# Altium PCB radhard.PcbDoc
Units mm, origin at the board's own origin, x right, y up, seen from the top; angles counter-clockwise.
Board outline 150 x 100 mm, 6 copper layers (Top Layer, Int1 (GND), Int2 (Sign), Int3 (Sign), Int4 (PWR), Bottom Layer), stack 1.551 mm thick; 48 components, 56 nets, 219 pads, 47 vias.
Unrouted connection lines stored in the file: 86.
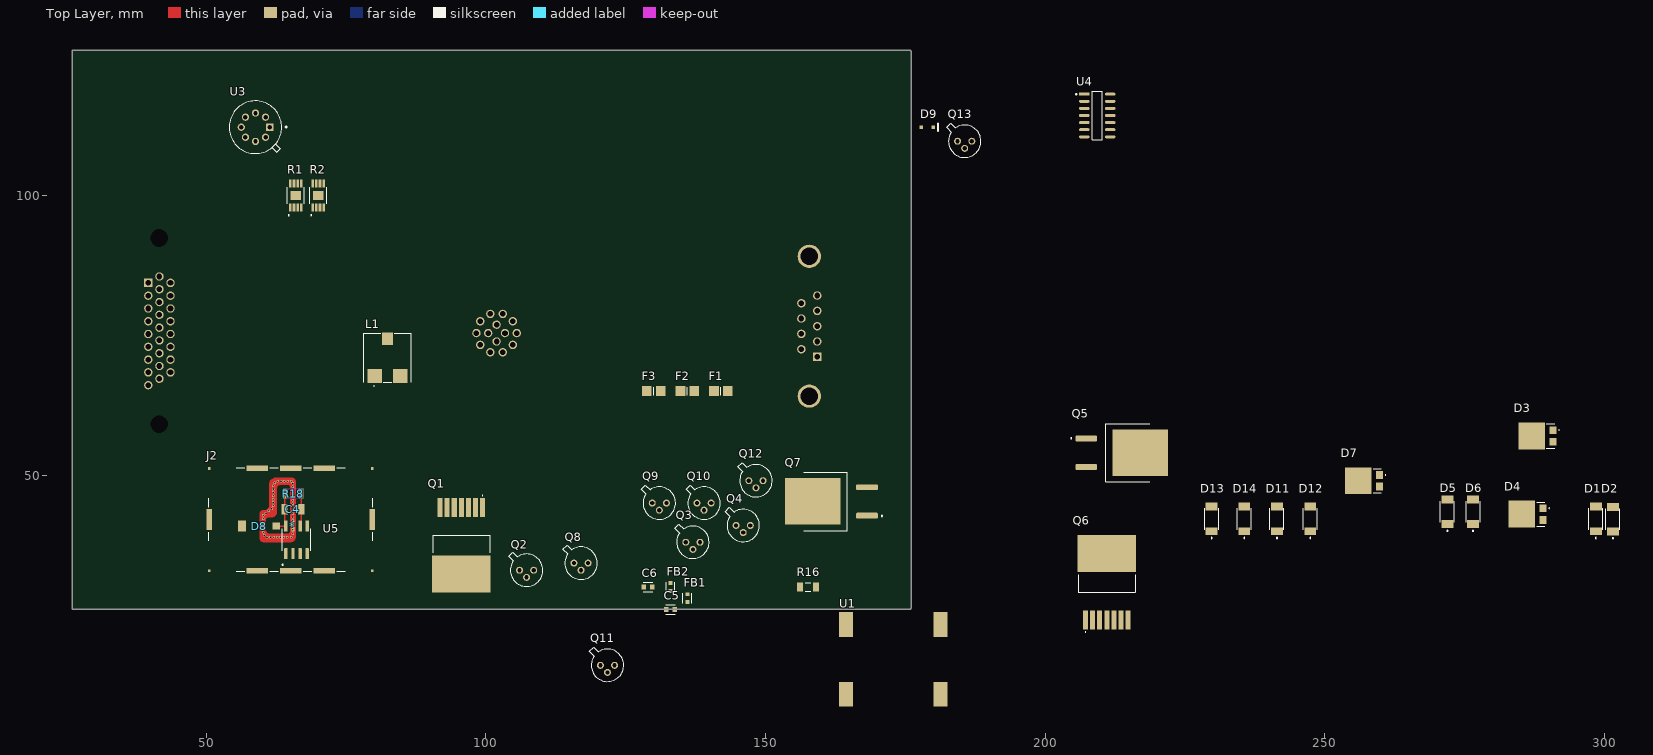
[diagram p0: Top Layer view]
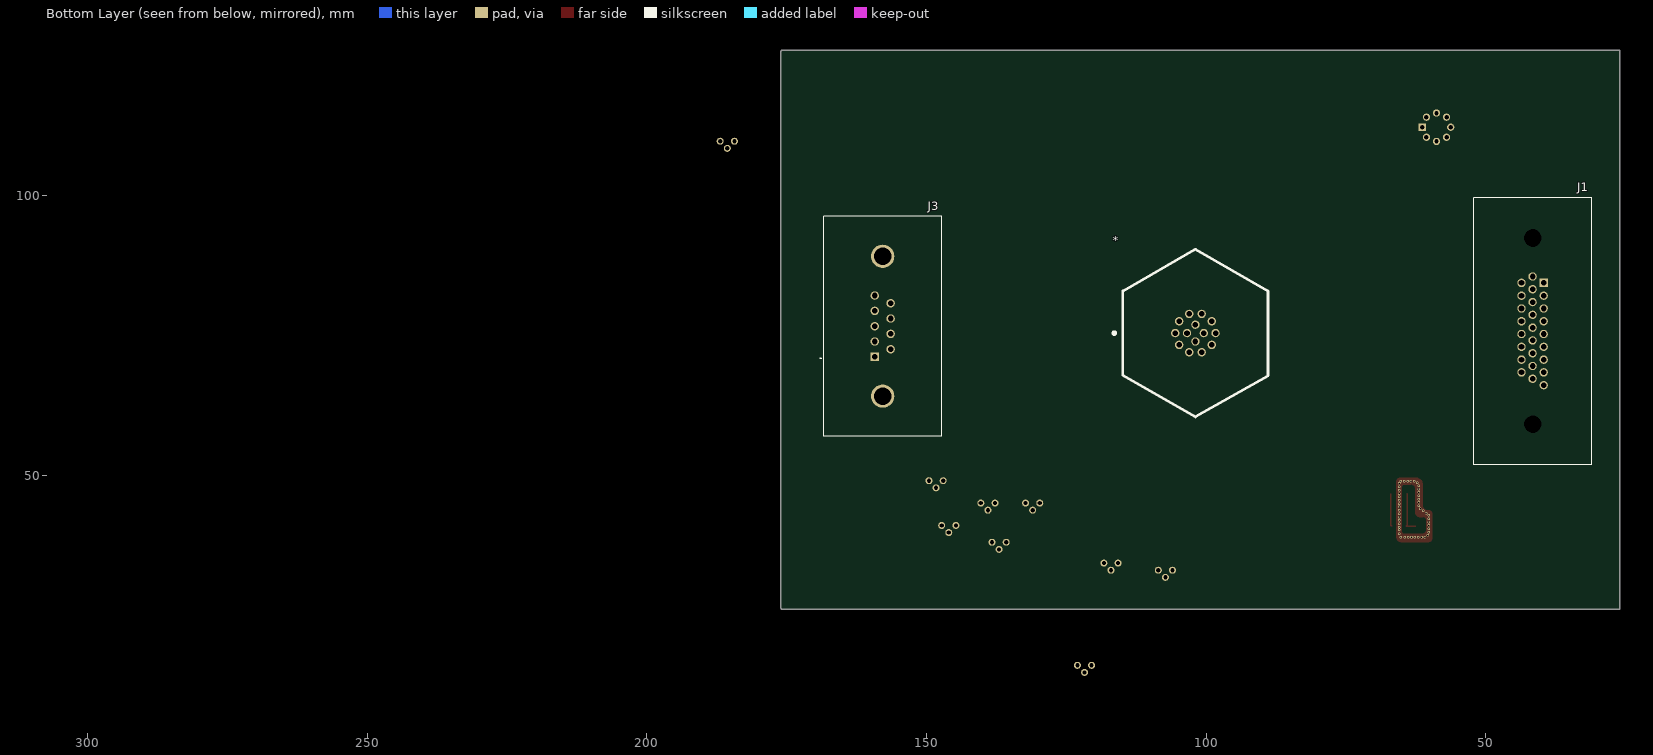
[diagram p1: Bottom Layer view, seen from below]
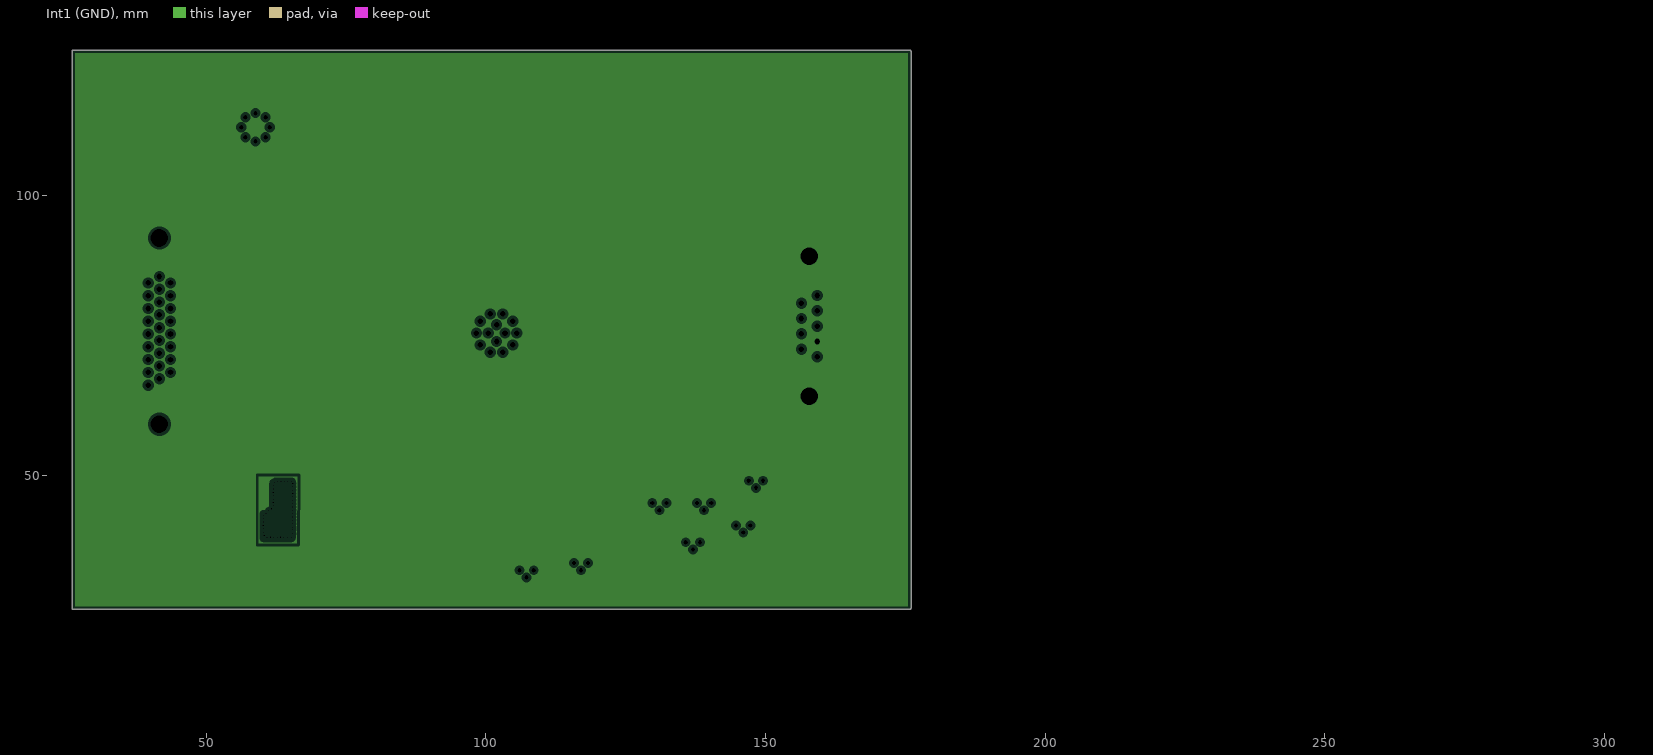
[diagram p2: Int1 (GND), clearances drawn from the general rule]
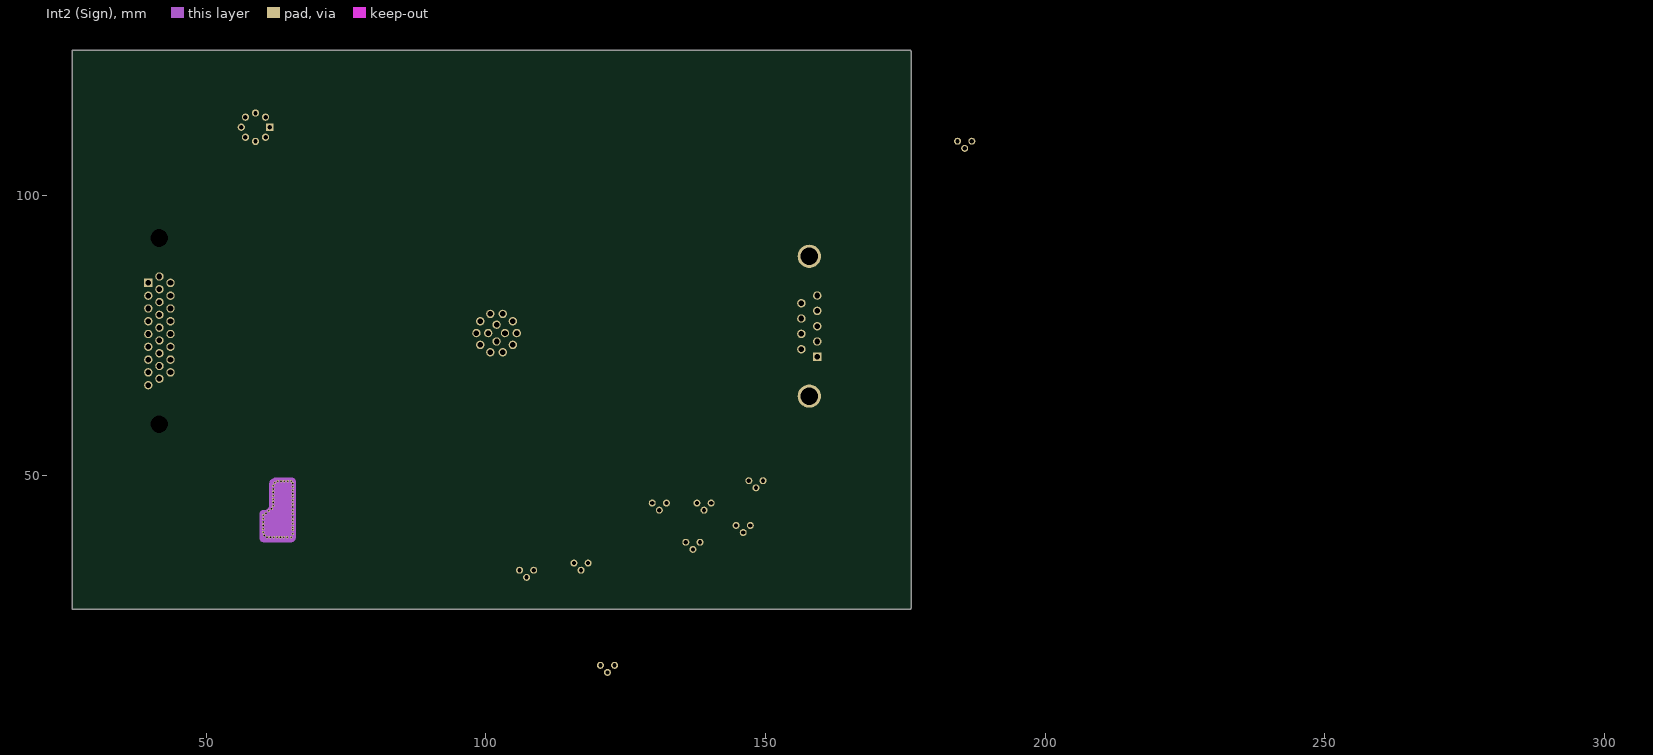
[diagram p3: Int2 (Sign)]
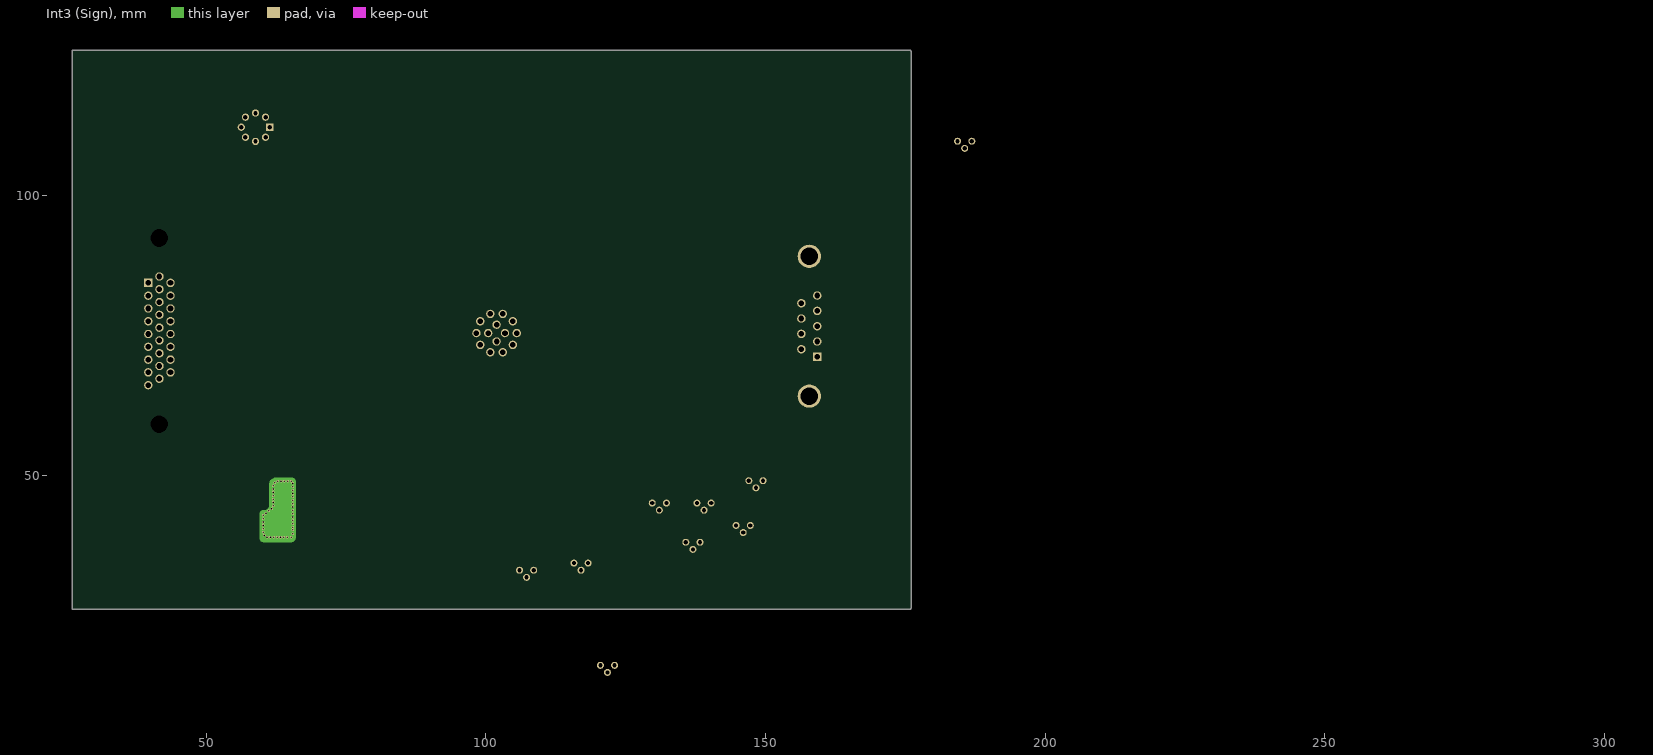
[diagram p4: Int3 (Sign)]
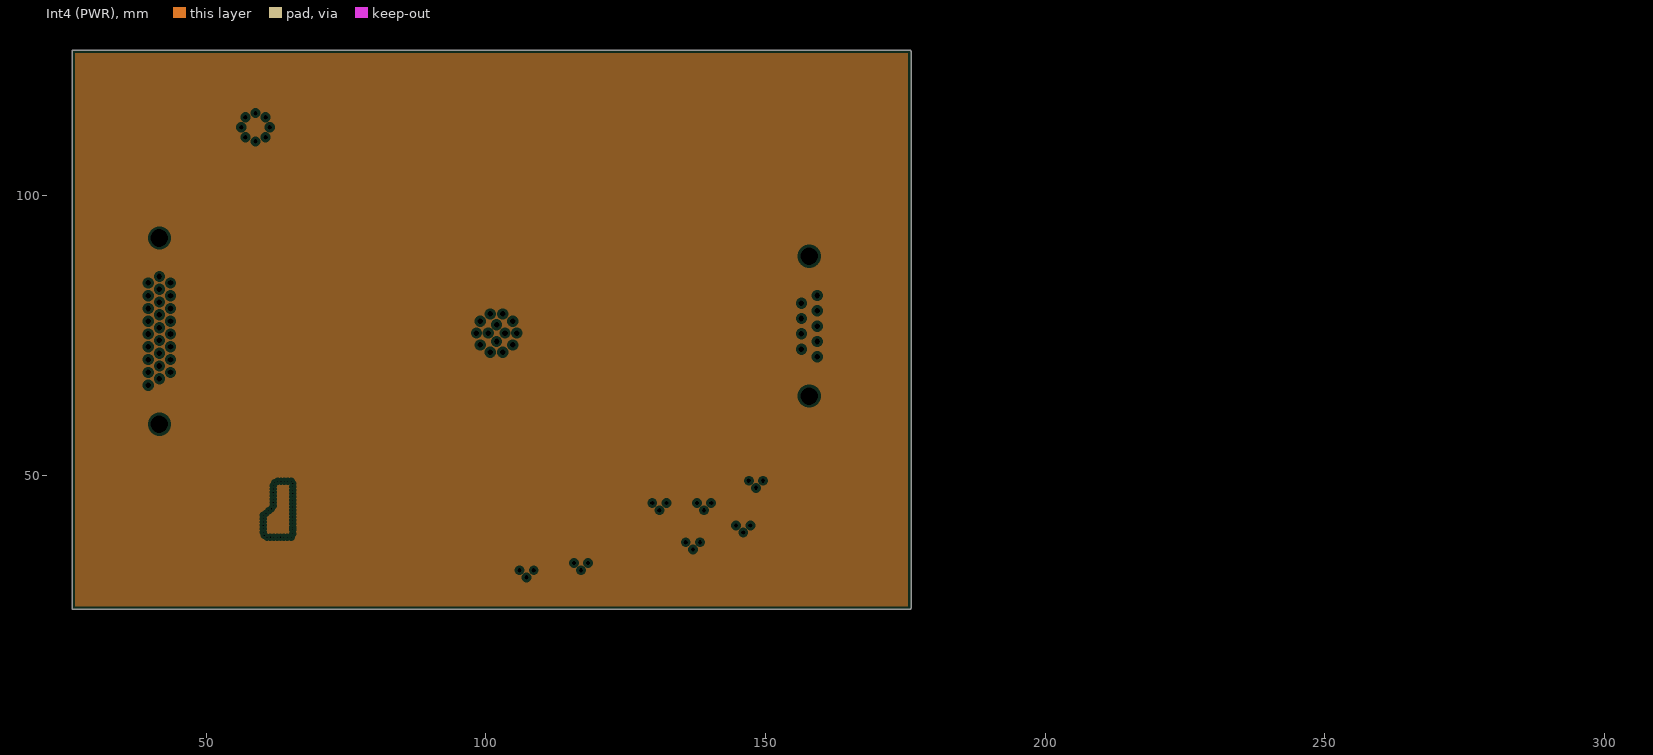
[diagram p5: Int4 (PWR), clearances drawn from the general rule]

## Layer stack, top to bottom
Top Solder: solder mask 0.0254, SM-001, Dk 4
Top Layer: signal copper 0.035
Dielectric 1: prepreg 0.0711, PP-006, Dk 4.1
Dielectric 2: prepreg 0.0711, PP-006, Dk 4.1
Int1 (GND): plane copper 0.035, net GND
Dielectric 3: core 0.4572, Core-035, Dk 4.7
Int2 (Sign): signal copper 0.035
Dielectric 4: prepreg 0.0711, PP-006, Dk 4.1
Dielectric 5: prepreg 0.0711, PP-006, Dk 4.1
Int3 (Sign): signal copper 0.035
Dielectric 6: core 0.4572, Core-035, Dk 4.7
Int4 (PWR): plane copper 0.035
Dielectric 7: prepreg 0.0711, PP-006, Dk 4.1
Dielectric 8: prepreg 0.0711, PP-006, Dk 4.1
Bottom Layer: signal copper 0.035
Bottom Solder: solder mask 0.0254, SM-001, Dk 4

## Board outline
26,26.254 26,125.746 cw(c26.254,125.746) 26.254,126 175.746,126 cw(c175.746,125.746) 176,125.746 176,26.254 cw(c175.746,26.254) 175.746,26 26.254,26 cw(c26.254,26.254)

## Design rules (kind name [scope] priority, off if disabled: settings)
Clearance [All] p1: gap=0.254 ignorepadtopadclearanceinfootprint=FALSE
ComponentClearance [All] p1: gap=0 collisioncheckmode=3 verticalgap=0.254 showdistances=FALSE
PlaneClearance [All] p1: clearance=0.508
PlaneConnect [All] p1: planeconnectstyle=Relief reliefexpansion=0.508 reliefentries=4 reliefconductorwidth=0.254 reliefairgap=0.254
PolygonConnect [All] p1: connectstyle=Relief reliefconductorwidth=0.254 reliefentries=4 polygonreliefangle="90 Angle" airgapwidth=0.254
RoutingVias [All] p1: holewidth=0.711 width=1.27 viastyle="Through Hole" minholewidth=0.711 minwidth=1.27 maxholewidth=0.711 maxwidth=1.27
SolderMaskExpansion [All] p1: expansion=0.102 istentingtop=FALSE
Width [All] p1: maxlimit=0.254 minlimit=0.254 preferedwidth=0.254
27 further rules are at their usual default settings.

## Classes and differential pairs
component class Interface: * J1 J3
component class Dosimeter: * C4 C5 C6 D8 FB1 FB2 J2 R15 R16 R18 U5
component class VoltageReference: D9 Q13 R1 R2 U3 U4
component class PowerSection: D1 D2 D3 D4 D5 D6 D7 D11 D12 D13 D14 F1 F2 F3 L1 Q1 Q2 Q3 Q4 Q5 Q6 Q7 Q8 Q9 Q10 Q11 Q12 U1

## Components (designator, comment, footprint, x,y, rotation, side; value= is the part's Value field where it differs from the comment)
* "Component_1" Guard 58.666,43.311 r0 top
* "ACRK-16-01-G-T-B1-M-1" PCBComponent_1 101.9,75.4 r180 bottom
C4 "12065A5R6DAT2A" CAPC3216X94N 65.5,43.9 r0 top
C5 "CC0603KRX7R7BB105" FP-CC0603-DA-MFG 133,26 r0 top value="1 uF"
C6 "CC0603KRX7R7BB105" FP-CC0603-DA-MFG 129,30 r0 top value="1 uF"
D1 "PTVS12VP1UP,115" PMEG3050EP115 298.45,42.164 r90 top
D2 "PTVS12VP1UP,115" PMEG3050EP115 301.498,42.123 r90 top
D3 "YQ15RSM10SDTL1" YQ15RSM10SDTL1 288,57 r90 top
D4 "YQ15RSM10SDTL1" YQ15RSM10SDTL1 286.235,43.04 r90 top
D5 "PTVS12VP1UP,115" PMEG3050EP115 271.907,43.434 r90 top
D6 "PTVS12VP1UP,115" PMEG3050EP115 276.479,43.434 r90 top
D7 "YQ15RSM10SDTL1" YQ15RSM10SDTL1 257,49 r90 top
D8 "BPW_34_SR-Z" DIO_BPW_34_SR-Z 59.45,40.9 r180 top
D9 "1N4148WS-E3-08" VISH-SOD-323-2_V 178.9,112.2 r0 top
D11 "PTVS12VP1UP,115" PMEG3050EP115 241.427,42.164 r90 top
D12 "PTVS12VP1UP,115" PMEG3050EP115 247.396,42.164 r90 top
D13 "PTVS12VP1UP,115" PMEG3050EP115 229.743,42.164 r90 top
D14 "PTVS12VP1UP,115" PMEG3050EP115 235.585,42.164 r90 top
F1 "0483005.DR" FUSC3316X137N 142,65 r0 top
F2 "0483010.DR" FUSC3316X137N 136,65 r0 top
F3 "0483005.DR" FUSC3316X137N 130,65 r0 top
FB1 "MH1608-601Y" FP-MH1608-MFG 136,28 r90 top
FB2 "MH1608-601Y" FP-MH1608-MFG 133,30 r90 top
J1 "MDBRA26PEAN0" MDBRA26PEAN0 39.64,84.372 r270 bottom
J2 "2118728-2" TE_2118728-2 65.1,42.05 r180 top
J3 "MDBRE09PE860" AMPHENOL_MDBRE09PE860 157.82,76.63 r90 bottom
L1 "SER8052-402MEC" SER8052402MEC 82.4,71 r0 top
Q1 "UJ4SC075018B7S" UJ4SC075018B7S 95.6,37 r180 top
Q2 "2N2222A" STM-TO-18-3 107.27,33 r0 top
Q3 "2N2222A" STM-TO-18-3 137,38 r0 top
Q4 "2N2222A" STM-TO-18-3 146,41 r0 top
Q5 "IXTA6N100D2" DPAK254P1524X483-3N 213.66,54 r0 top
Q6 "UJ4SC075018B7S" UJ4SC075018B7S 211,31.301 r0 top
Q7 "IXTA6N100D2" DPAK254P1524X483-3N 161.8,45.3 r180 top
Q8 "2N2222A" STM-TO-18-3 117,34.27 r0 top
Q9 "2N2222A" STM-TO-18-3 131,45 r0 top
Q10 "2N2222A" STM-TO-18-3 139,45 r0 top
Q11 "2N2222A" STM-TO-18-3 121.73,16 r0 top
Q12 "2N2222A" STM-TO-18-3 148.27,49 r0 top
Q13 "2N2222A" STM-TO-18-3 185.6,109.7 r0 top
R1 "LT5400ACMS8E-3#PBF" SOP65P490X110-9N 66,100 r90 top
R2 "LT5400BHMS8E-8#TRPBF" SOP65P490X110-9N 70,100 r90 top
R16 "ERJ-8GEYJ241V" RESC3216X70X50NL05T20 157.575,30 r0 top
R18 "CRHP1206AF1G00FKET" RES_CRHP1206_VIS 65.552,46.7 r0 top
U1 "CH4659-ALD" CH4659-ALD_COC 172.6,17.054 r90 top
U3 "LTZ1000ACH#PBF" FP-H-8-05-08-1320-MFG 58.796,112.204 r0 top
U4 "ADA4522-4ARZ-RL" FP-R-14-IPC_C 209.296,114.3 r0 top
U5 "ADA4530-1ARZ" SOIC127P600X175-8N 66.135,38.425 r90 top

## Footprints (in the part's own frame and the unit in brackets; to place one, negate y for a bottom-side part, rotate by r counter-clockwise, add the part's x,y. Pads: shape width x height; smd on the part's side, far side on the other; paste and mask are expansions set on the pad)
AMPHENOL_MDBRE09PE860 [mm]
  rect 1.508x1.508 hole 1: 1(-5.48,1.42)
  round 1.508 hole 1: 2(-2.74,1.42) 3(0,1.42) 4(2.74,1.42) 5(5.48,1.42) 6(-4.11,-1.42) 7(-1.37,-1.42) 8(1.37,-1.42) 9(4.11,-1.42)
  round 4.166 hole 3.15: SH1(-12.495,0) SH2(12.495,0)
  silkscreen extent -19.7,-10.55 19.7,11.2, body extent -19.68,-10.55 19.72,10.55, height 14.53
CAPC3216X94N [mm]
  rect 1.16x1.82 smd: 1(-1.475,0) 2(1.475,0)
  body extent -1.6,-0.8 1.6,0.8, height 0.94
CH4659-ALD_COC [mil]
  rect 175x98.43 smd paste+0 mask+0: 1(-245,325) 2(-245,-340) 3(245,-340) 4(245,325)
  silkscreen extent -668,201 -660,209, body extent -335,-390 335,380, height 379
DIO_BPW_34_SR-Z [mm]
  rect 1.4x1.2 smd paste-0.05 mask+0.05: A(-3.05,0)
  rect 1.4x2 smd paste-0.05 mask+0.05: C(3.05,0)
  body extent -3.22,-1.92 3.22,1.92, height 1.3
DPAK254P1524X483-3N [mm]
  rrect50% 3.93x1.06 smd: 1(-6.33,2.54) 3(-6.33,-2.54)
  rect 9.91x8.3 smd paste-6 mask+0: 4(3.34,0)
  silkscreen extent -9.1,-5.21 5,5.21, body extent -7.87,-5.08 7.37,4.95, height 4.7
FP-CC0603-DA-MFG [mm]
  rect 0.8x0.9 smd paste+0 mask+0: 1(-0.75,0) 2(0.75,0)
  silkscreen extent -0.85,-0.85 0.85,0.85, body extent -1.35,-0.75 1.35,0.75, height 0.25
FP-H-8-05-08-1320-MFG [mm]
  rect 1.3x1.3 hole 0.8 paste-2539.97 mask+0: 1(2.54,0)
  round 1.3 hole 0.8 paste-2539.97 mask+0: 2(1.796,1.796) 3(0,2.54) 4(-1.796,1.796) 5(-2.54,0) 6(-1.796,-1.796) 7(0,-2.54) 8(1.796,-1.796)
  silkscreen extent -4.7,-4.7 5.6,4.7, body extent -4.8,-4.8 4.8,4.8, height 0.25
FP-MH1608-MFG [mm]
  rect 0.7x0.7 smd paste+0 mask+0: 1(-0.7,0) 2(0.7,0)
  silkscreen extent -0.87,-0.8 0.87,0.8, body extent -1.15,-0.6 1.15,0.6, height 0.25
FP-R-14-IPC_C [mm]
  rect 1.874x0.542 smd paste+0 mask+0: 1(-2.316,3.81)
  rrect100% 1.874x0.542 smd paste+0 mask+0: 2(-2.316,2.54) 3(-2.316,1.27) 4(-2.316,0) 5(-2.316,-1.27) 6(-2.316,-2.54) 7(-2.316,-3.81) 8(2.316,-3.81) 9(2.316,-2.54) 10(2.316,-1.27) 11(2.316,0) 12(2.316,1.27) 13(2.316,2.54) 14(2.316,3.81)
  silkscreen extent -3.88,-4.33 0.88,4.33, body extent -3.35,-4.43 3.35,4.43, height 0.25
FUSC3316X137N [mm]
  rect 1.75x1.79 smd: 1(-1.235,0) 2(1.235,0)
  silkscreen extent 0,-0.69 0,0.69, body extent -1.65,-0.79 1.65,0.79, height 1.37
Guard [mm]
  rrect25% 0.6x1.97 smd: 1(6.834,-2.411)
  Top Layer region: 6.3,-3.5 6.277,-3.615 6.212,-3.712 6.115,-3.777 6,-3.8 6,-3.8 2.7,-3.8 2.432,-3.747 2.205,-3.595 2.053,-3.368 2,-3.1 2,-3.1 2,-1.3 2.038,-1.109 2.146,-0.946 2.309,-0.838 2.5,-0.8 2.5,-0.8 3.2,-0.8 3.468,-0.747 3.695,-0.595 3.847,-0.368 3.9,-0.1 3.9,-0.1 3.9,4.2 3.961,4.506 4.134,4.766 4.394,4.939 4.7,5 4.7,5 5.9,5 6.053,4.97 6.183,4.883 6.27,4.753 6.3,4.6 6.3,4.6 6.3,-2.3 6.308,-2.338 6.329,-2.371 6.362,-2.392 6.4,-2.4 6.4,-2.4 7.1,-2.4 7.177,-2.385 7.241,-2.341 7.285,-2.277 7.3,-2.2 7.3,-2.2 7.3,5.6 7.254,5.83 7.124,6.024 6.93,6.154 6.7,6.2 6.7,6.2 3.7,6.2 3.279,6.116 2.922,5.878 2.684,5.521 2.6,5.1 2.6,5.1 2.6,1.4 2.524,1.017 2.307,0.693 1.983,0.476 1.6,0.4 1.6,0.4 1.5,0.4 1.27,0.354 1.076,0.224 0.946,0.03 0.9,-0.2 0.9,-0.2 0.9,-4.6 0.953,-4.868 1.105,-5.095 1.332,-5.247 1.6,-5.3 1.6,-5.3 6.4,-5.3 6.744,-5.231 7.036,-5.036 7.231,-4.744 7.3,-4.4 7.3,-4.4 7.3,-2.6 7.285,-2.523 7.241,-2.459 7.177,-2.415 7.1,-2.4 7.1,-2.4 6.4,-2.4 6.362,-2.408 6.329,-2.429 6.308,-2.462 6.3,-2.5 6.3,-2.5
  Int2 (Sign) region: 7.3,-4.5 7.239,-4.806 7.066,-5.066 6.806,-5.239 6.5,-5.3 6.5,-5.3 1.6,-5.3 1.332,-5.247 1.105,-5.095 0.953,-4.868 0.9,-4.6 0.9,-4.6 0.9,-0.2 0.946,0.03 1.076,0.224 1.27,0.354 1.5,0.4 1.5,0.4 1.6,0.4 1.983,0.476 2.307,0.693 2.524,1.017 2.6,1.4 2.6,1.4 2.6,5.1 2.684,5.521 2.922,5.878 3.279,6.116 3.7,6.2 3.7,6.2 6.7,6.2 6.93,6.154 7.124,6.024 7.254,5.83 7.3,5.6 7.3,5.6
  Int3 (Sign) region: 7.3,-4.5 7.239,-4.806 7.066,-5.066 6.806,-5.239 6.5,-5.3 6.5,-5.3 1.6,-5.3 1.332,-5.247 1.105,-5.095 0.953,-4.868 0.9,-4.6 0.9,-4.6 0.9,-0.2 0.946,0.03 1.076,0.224 1.27,0.354 1.5,0.4 1.5,0.4 1.6,0.4 1.983,0.476 2.307,0.693 2.524,1.017 2.6,1.4 2.6,1.4 2.6,5.1 2.684,5.521 2.922,5.878 3.279,6.116 3.7,6.2 3.7,6.2 6.7,6.2 6.93,6.154 7.124,6.024 7.254,5.83 7.3,5.6 7.3,5.6
  Int1 (GND) region: 7.3,-4.5 7.239,-4.806 7.066,-5.066 6.806,-5.239 6.5,-5.3 6.5,-5.3 1.6,-5.3 1.332,-5.247 1.105,-5.095 0.953,-4.868 0.9,-4.6 0.9,-4.6 0.9,-0.2 0.946,0.03 1.076,0.224 1.27,0.354 1.5,0.4 1.5,0.4 1.6,0.4 1.983,0.476 2.307,0.693 2.524,1.017 2.6,1.4 2.6,1.4 2.6,5.1 2.684,5.521 2.922,5.878 3.279,6.116 3.7,6.2 3.7,6.2 6.7,6.2 6.93,6.154 7.124,6.024 7.254,5.83 7.3,5.6 7.3,5.6
MDBRA26PEAN0 [mm]
  rect 1.5x1.5 hole 1: 1(0,0)
  round 1.5 hole 1: 2(2.286,0) 3(4.572,0) 4(6.858,0) 5(9.144,0) 6(11.43,0) 7(13.716,0) 8(16.002,0) 9(18.29,0) 10(-1.143,-1.98) 11(1.143,-1.98) 12(3.429,-1.98) 13(5.715,-1.98) 14(8.001,-1.98) 15(10.287,-1.98) 16(12.573,-1.98) 17(14.859,-1.98) 18(17.145,-1.98) 19(0,-3.96) 20(2.286,-3.96) 21(4.572,-3.96) 22(6.858,-3.96) 23(9.144,-3.96) 24(11.43,-3.96) 25(13.716,-3.96) 26(16.002,-3.96)
  round 1.575 hole 3.15 unplated: MH1(-8.02,-1.98) MH2(25.3,-1.98)
  silkscreen extent -15.21,-12.53 32.5,8.57, body extent -15.2,-12.53 32.5,8.57, height 13.72
PCBComponent_1 [mm]
  round 1.5 hole 1: 1(-3.6,0) 2(-2.912,2.116) 3(-1.112,3.424) 4(1.112,3.424) 5(2.912,2.116) 6(3.6,0) 7(2.912,-2.116) 8(1.112,-3.424) 9(-1.112,-3.424) 10(-2.912,-2.116) 11(-1.5,0) 12(0,1.5) 13(1.5,0) 14(0,-1.5)
  silkscreen extent -14.7,-15 13,15, body extent -13.28,-15.02 13.28,15.02, height 23.52
PMEG3050EP115 [mm]
  rect 1.4x2.1 smd: 1(-2.2,0) 2(2.2,0)
  silkscreen extent -3.5,-1.25 1.9,1.25, body extent -2.33,-1.3 2.37,1.3, height 1.07
RES_CRHP1206_VIS [mil]
  rect 33x69 smd paste+0 mask+0: 1(-57,0) 2(57,0)
  Top Layer keep-out region: -38.5,-32.5 -38.5,32.5 38.5,32.5 38.5,-32.5
  body extent -63,-33 63,30, height 26
RESC3216X70X50NL05T20 [mm] "Chip Resistor, 2-Leads, Body 3.20x1.60mm, IPC Medium Density"
  rect 1.1x1.65 smd: 1(-1.425,0) 2(1.425,0)
  silkscreen extent -0.5,-0.72 0.5,0.72, body extent -1.63,-0.82 1.62,0.82, height 0.7
SER8052402MEC [mm]
  rect 2.55x2.5 smd: 1(-2.3,-3.25) 2(2.3,-3.25)
  rect 2x2.2 smd: 3(0,3.4)
  silkscreen extent -4.25,-5.1 4.25,4.4, body extent -4.2,-4.37 4.3,4.43, height 5.01
SOIC127P600X175-8N [mm]
  rrect25% 1.97x0.6 smd: 1(-2.475,1.905) 2(-2.475,0.635) 3(-2.475,-0.635) 4(-2.475,-1.905) 5(2.475,-1.905) 6(2.475,-0.635) 7(2.475,0.635) 8(2.475,1.905)
  silkscreen extent -4.54,-2.52 1.95,2.6, body extent -3,-2.45 3,2.45, height 1.75
SOP65P490X110-9N [mm]
  rrect25% 1.45x0.48 smd: 1(-2.16,0.975) 2(-2.16,0.325) 3(-2.16,-0.325) 4(-2.16,-0.975) 5(2.16,-0.975) 6(2.16,-0.325) 7(2.16,0.325) 8(2.16,0.975)
  rect 1.68x1.88 smd paste-2: 9(0,0)
  silkscreen extent -3.6,-1.53 1.5,1.53, body extent -2.45,-1.5 2.45,1.5, height 1.1
STM-TO-18-3 [mm] "TO, 3-Leads, Diameter 5.8mm"
  round 1.25 hole 0.75: 1(0,-1.27) 2(1.27,0) 3(-1.27,0)
  silkscreen extent -3.23,-2.9 2.9,3.23, body extent -3.23,-2.9 2.9,3.23, height 5.3
TE_2118728-2 [mm]
  rect 0.5x0.5 smd paste-1 mask+0: SH1(-14.58,-9.15) SH5(14.58,-9.15) SH7(14.58,9.15) SH11(-14.58,9.15)
  rect 3.8x1 smd: SH2(-6,-9.15) SH3(0,-9.15) SH4(6,-9.15) SH8(6,9.15) SH9(0,9.15) SH10(-6,9.15)
  rect 1x3.8 smd: SH6(14.58,0) SH12(-14.58,0)
  silkscreen extent -14.68,-9.25 14.68,9.25, body extent -14.68,-9.25 14.68,9.25, height 7.01
UJ4SC075018B7S [mm]
  rect 0.9x3.4 smd: 1(-3.81,-7.185) 2(-2.54,-7.185) 3(-1.27,-7.185) 4(0,-7.185) 5(1.27,-7.185) 6(2.54,-7.185) 7(3.81,-7.185)
  rect 10.48x6.604 smd: 8(0,4.699)
  silkscreen extent -5.09,-9.4 5.09,0.86, body extent -5.09,-8.17 5.09,7.33, height 4.56
VISH-SOD-323-2_V [mm] "SMD, 2-Leads, Body 1.775x1.3mm"
  rect 0.6x0.6 smd: 1(-1.1,0) 2(1.1,0)
  silkscreen extent 1.9,-0.65 1.9,0.65, body extent -0.89,-0.65 0.89,0.65, height 1.15
YQ15RSM10SDTL1 [mm]
  rect 1.4x1.27 smd: 1(1.04,-2.765) 2(-1.04,-2.765)
  rect 4.8x4.72 smd: 3(0,1.04)
  silkscreen extent -2.15,-3.9 2.15,-1.6, body extent -2.15,-3.27 2.15,3.05, height 1.3

## Part data
*: library part ACRK-16-01-G-T-B1-M-1
*: library part Component_1
C4: "CAP CER 5.6PF 50V C0G/NP0 1206", Package=None, Availability=Unavailable, MF="{'manufacturer': u'AVX'}", MP=12065A5R6DAT2A, Price=None
C5 C6: library part CMP-03422-000924-1, "CAP CER 1UF 16V X7R 0603", Capacitance="1 uF", Manufacturer=YAGEO, Package=CC0603-DA, Temperature="-55°C to +125°C", Temperature Characteristic=X7R, Temperature Coefficient=15%, Temperature Range High=+125°C, Temperature Range Low=-55°C, Tolerance=0.1, Voltage="16 V", Automotive=No, Category=Cap, ComponentLink2Description=Datasheet, ComponentLink2URL=http://www.yageo.com/documents/recent/UPY-GPHC_X7R_6.3V-to-50V_18.pdf, Device Class L1="Passive Components", Device Class L2=Capacitors, Device Class L3="Ceramic Capacitors", Digikey Description="CAP CER 1UF 16V X7R 0603", Footprint Url=http://www.yageo.com/exep/pages/download/literatures/UPY-C_GEN_24.pdf, Height=0.9mm, Lead Free=Yes, Manufacturer Part Number=CC0603KRX7R7BB105, Material=Ceramic, Mouser Description="Multilayer Ceramic Capacitor, CC Series, 1 - F, - 10%, X7R, 16 V, 0603 [1608 Metric]", Octopart=https://octopart.com/cc0603krx7r7bb105-yageo-42271928, RoHS=TRUE, Voltage Rating="16 V"
D1 D2 D5 D6 D11 D12 D13 D14: "Diode ESD (Uni-directional)", Manufacturer_Name=Nexperia, Mouser Part Number=771-PTVS12VP1UP115, Arrow Part Number=PTVS12VP1UP,115, Arrow Price/Stock=https://www.arrow.com/en/products/ptvs12vp1up115/nexperia, Datasheet Link=https://assets.nexperia.com/documents/data-sheet/PTVSXP1UP_SER.pdf, Height=1mm, Manufacturer_Part_Number=PTVS12VP1UP,115, Mouser Price/Stock=https://www.mouser.co.uk/ProductDetail/Nexperia/PTVS12VP1UP115?qs=5eMHoInnifTeU9%2FVxPGuCA%3D%3D
D3 D4 D7: "Schottky Diode", Manufacturer_Name="ROHM Semiconductor", Mouser Part Number=755-YQ15RSM10SDTL1, Datasheet Link=https://fscdn.rohm.com/en/products/databook/datasheet/discrete/diode/schottky_barrier/yq15rsm10sdtl1-e.pdf, Height=1.2mm, Manufacturer_Part_Number=YQ15RSM10SDTL1, Mouser Price/Stock=https://www.mouser.co.uk/ProductDetail/ROHM-Semiconductor/YQ15RSM10SDTL1?qs=Z%252BL2brAPG1JP7erh913hZg%3D%3D
D8: "Silicon PIN Photodiode", Package=None, Availability=Unavailable, MF="{'manufacturer': u'OSRAM Opto'}", MP=BPW_34_SR-Z, Price=None
D9: library part CMP-2000-05517-2, "Small Signal Fast Switching Diode, 1.2 V, 350 mA, -55 to 150 degC, 2-Pin SOD-323, RoHS, Tape and Reel", Forward Continuous Current=150mA, Forward Voltage Drop=1.2V, Manufacturer=Vishay, Max Surge Current=350mA, Maximum Diode Capacitance=4pF, Maximum Operating Temperature=+150C, Maximum Power Dissipation=200mW, Maximum Reverse Leakage Current=100uA, Minimum Operating Temperature=-55C, Operating Temperature Range=-55Cto+150C, Package / Case=SOD-323, Package Description="2-Pin Surface Mount Device, Body 1.775 x 1.3 mm, Height 1.15 mm", Package Reference=SOD-323-2, Package Version="Rev. 5, 09/2009", Peak Reverse Voltage=100V, Brand=VishaySemiconductors, Datasheet URL=http://www.vishay.com/docs/85751/1n4148ws.pdf, Datasheet Version="Rev. 2.0, 05/2013", Factory Pack Quantity=3000, Manufacturer URL=http://www.vishay.com/, Mounting Style=SMD/SMT, Mounting Technology=SurfaceMount, Package URL=http://www.st.com/st-web-ui/static/active/en/resource/technical/document/datasheet/CD00233088.pdf, Packaging=Reel, Product=SwitchingDiodes, Product Category=Diodes-GeneralPurpose,Power,Switching, Recovery Time=4ns, RoHS=Details, Series=1N4148WS, Unit Weight=0.000152oz
F1 F3: "Fuse", Manufacturer_Name=LITTELFUSE, Mouser Part Number=576-0483005.DR, Datasheet Link=https://cdn1-originals.webdamdb.com/12956_149052564?cache=1683183235&response-content-disposition=inline;filename=Littelfuse_Fuse_483A.pdf&response-content-type=application/pdf&Policy=eyJTdGF0ZW1lbnQiOlt7IlJlc291cmNlIjoiaHR0cCo6Ly9jZG4xLW9yaWdpbmFscy53ZWJ, Height=1.371mm, Manufacturer_Part_Number=0483005.DR, Mouser Price/Stock=https://www.mouser.co.uk/ProductDetail/Littelfuse/0483005.DR?qs=%252BEew9%252B0nqrAp%252B2CptGC9xg%3D%3D
F2: "Fuse", Manufacturer_Name=LITTELFUSE, Datasheet Link=https://www.littelfuse.com/media?resourcetype=datasheets&itemid=c0438919-6934-484b-af98-072ed2079425&filename=littelfuse-fuse-483a, Height=1.371mm, Manufacturer_Part_Number=0483010.DR
FB1 FB2: library part CMP-2000-06698-2, "FERRITE BEAD 600 OHM 0603 1LN", Case Code (Imperial)=0603, Case Code (Metric)=1608, Current Rating=3A, DC Current=1A, DC Resistance (DCR)=25mR, Max Operating Temperature=125°C, Min Operating Temperature=-55°C, Package Quantity=1, Test Frequency=100MHz, Tolerance=25%, Case/Package=0603, Core Material=Ferrite, Depth=1mm, Height=0.039inch, Impedance=600R, Length=0.063inch, Max Current Rating=1A, Max DC Current=1A, Military Standard=Not, Mount="Surface Mount", Number of Lines=1, Packaging="Tape and Reel", Radiation Hardening=No, REACH SVHC="No SVHC", RoHS Compliant=Yes, Series=MH, Termination=SMD/SMT, Width=0.031inch
J1: "Connector", Manufacturer_Name="Amphenol Communications Solutions", Mouser Part Number=523-MDBRA26PEAN0, Datasheet Link=https://cdn.amphenol-cs.com/media/wysiwyg/files/documentation/datasheet/inputoutput/io_harsh_mdbr.pdf, Height=15.18mm, Manufacturer_Part_Number=MDBRA26PEAN0, Mouser Price/Stock=https://www.mouser.co.uk/ProductDetail/Amphenol-Commercial-Products/MDBRA26PEAN0?qs=ToP8pWlZ0bMfgHuNRziKHA%3D%3D
J2 J3 U5: Package=None, Availability=Unavailable, Price=None
  J2: MF="{'manufacturer': u'TE Connectivity'}", MP=2118728-2
  J3: MF="{'manufacturer': u'Amphenol Commercial Products'}", MP=MDBRE09PE860
  U5: MF="{'manufacturer': u'Analog Devices'}", MP=ADA4530-1ARZ
L1: "Inductor", Manufacturer_Name=COILCRAFT, Mouser Part Number=994-SER8052-402MEC, Datasheet Link=https://www.coilcraft.com/getmedia/f704c02a-b3a0-4aab-a2f9-03662c81c40d/ser80xx.pdf, Height=5.2mm, Manufacturer_Part_Number=SER8052-402MEC, Mouser Price/Stock=https://www.mouser.co.uk/ProductDetail/Coilcraft/SER8052-402MEC?qs=mBwMfv9Clf3lT8OdMPOqNQ%3D%3D
Q1 Q6: "MOSFET 750V/18mO,SICFET,G4,TO263-7", ComponentLink1Description="New link"
Q2 Q3 Q4 Q8 Q9 Q10 Q11 Q12 Q13: library part CMP-2000-05381-1, "High Speed Switch, 0.6 A IC, -65 to 175 degC, 3-Pin TO-18, RoHS, Bulk", Collector Emitter Voltage V(br)ceo=40V, DC Collector Current=600mA, DC Current Gain hFE=300hFE, Manufacturer=STMicroelectronics, Operating Temperature Max=175degC, Package Description="3-Pin Through Hole Device, Dia 5.8 mm, Pitch 1.27 mm", Package Reference=TO-18-3, Power Dissipation Pd=500mW, Transistor Case Style=TO-18, Transition Frequency ft=300MHz, Automotive Qualification Standard=-, Datasheet URL=https://datasheet.ciiva.com/25917/cd00003223-25917094.pdf, Datasheet Version=Feb-03, Manufacturer URL=http://www.st.com/, No. of Pins=3Pins, Product Range=-, Transistor Polarity=NPN
Q5 Q7: "N-Channel 1000 V 6 A 2.2 Ohm SMT Depletion Mode Power Mosfet - D2PAK", Package=None, Availability=Unavailable, MF="{'manufacturer': u'IXYS'}", MP=IXTA6N100D2, Price=None
R1 R2: "1k, 9k Ohm Â±15% 800mW Power Per Element Isolated Resistor Network/Array Â±25ppm/Â°C 8-TSSOP, 8-MSOP (0.118\", 3.00mm Width) Exposed Pad", Package=None, Availability=Unavailable, MF="{'manufacturer': u'Analog Devices'}", Price=None
  R1: MP=LT5400ACMS8E-3#PBF
  R2: MP=LT5400BHMS8E-8#TRPBF
R16: library part CMP-2003-00592-1, Manufacturer=Panasonic, Part Number=ERJ-8GEYJ241V
R18: "No Description Available", Mfr_Name=Vishay
U1: "No Description Available", Mfr_Name=Coilcraft, RefDes=RefDes, Type=Type
U3: library part CMP-09137-000002-1, "IC VREF SHUNT 7.2V TO5", Ambient Temperature Range High=+125°C, Ambient Temperature Range Low=-55°C, Manufacturer="Analog Devices", Max Junction Temp=+150°C, Package=H-8-05-08-1320, Temperature="-55°C to +125°C", Automotive=No, Category=IC, ComponentLink2Description=Datasheet, ComponentLink2URL=https://www.analog.com/media/en/technical-documentation/data-sheets/LTZ1000.pdf, Device Class L1="Integrated Circuits (ICs)", Device Class L2="Power Management ICs", Device Class L3="Voltage References", Digikey Description="IC VREF SHUNT 7.2V TO5", Height=5.969mm, Lead Free=Yes, Manufacturer Part Number=LTZ1000ACH#PBF, Number Of Outputs=1, Octopart=https://octopart.com/ltz1000ach%23pbf-analog+devices-88320833, Output Type=Fixed, Reference Type="Buried Zener", RoHS=TRUE, Standoff Height=0.254mm, Temperature Range High=+125°C, Temperature Range Low=-55°C
U4: library part CMP-09116-000280-1, "IC OPAMP ZERO-DRIFT 4CIRC 14SOIC", Case/Package=SOIC, Input Bias Current=50pA, Input Offset Voltage (Vos)=1.5uV, Max Dual Supply Voltage=27.5V, Max Operating Temperature=125°C, Max Supply Voltage=55V, Min Dual Supply Voltage=2.25V, Min Operating Temperature=-40°C, Min Supply Voltage=4.5V, Operating Supply Current=830uA, Output Current per Channel=32mA, Power Supply Rejection Ratio (PSRR)=150dB, Voltage Gain=137dB, Common Mode Rejection Ratio=140dB, Contact Plating=Tin, Gain Bandwidth Product=2.7MHz, Lead Free="Contains Lead", Mount="Surface Mount", Number of Circuits=4, Number of Pins=14, Packaging="Tape and Reel", RoHS Compliant=Yes, Slew Rate=1.7V/µs

## Via types
v1: diameter 0.45, hole 0.3, Top Layer to Bottom Layer, 47 vias

## Nets (pads, with @x,y where several pads share a name; then routed paths per layer and width w, separated by ;. In a path a pad name is that pad's centre, name@x,y a point inside that pad or via, vN(x,y) a via of type N, cw(c..) or ccw(c..) an arc to the next point about the centre after c; other vN are vias at no path point)
+12_F: C5.2 FB1.2 U5.5
-12_F: C6.2 FB2.1 U5.4
GND: C5.1 C6.1 D7.1 D7.2 D8.C D13.2 D14.2 J2.SH1 J2.SH2 J2.SH3 J2.SH4 J2.SH5 J2.SH6 J2.SH7 J2.SH8 J2.SH9 J2.SH10 J2.SH11 J2.SH12 J3.2 J3.SH1 J3.SH2 U1.3 U1.4 U5.1
Net*_1: *.1@105.5,75.4 U5.2 U5.7
NetC1_2: L1.1 U1.2
NetC2_2: F1.1 F3.1 L1.2
NetC3_2: D7.3 Q5.3 Q7.3
NetC4_1: C4.1 D8.A R18.1 U5.8 | length 7.7
  Top Layer w0.254: D8.A U5.8 cw(c64.23,41.105) 64.025,41.105 C4.1 64.025,46.621 cw(c64.104,46.621) R18.1
NetC4_2: C4.2 R16.1 R18.2 U5.6 | length 5.9
  Top Layer w0.254: U5.6 ccw(c66.77,41.105) 66.975,41.105 C4.2 ccw(c66.975,43.925) 67,43.925 R18.2
NetD1_1: D1.1 Q1.1 Q3.2 Q4.2 Q11.2
NetD1_2: D1.2 D2.2
NetD2_1: D2.1 Q1.2
NetD3_1: D3.1 D3.2
NetD3_3: D3.3 D4.1 D4.2
NetD4_3: D4.3 F2.1
NetD5_1: D5.1 Q6.1 Q9.2 Q10.2 Q12.2
NetD5_2: D5.2 D6.2
NetD6_1: D6.1 Q6.2
NetD9_1: D9.1 U3.2
NetD11_1: D11.1 D12.1 F2.2 U1.1
NetD11_2: D11.2 D13.1
NetD12_2: D12.2 D14.1
NetF1_2: F1.2 Q1.8
NetF3_2: F3.2 Q6.8
NetFB1_1: FB1.1
NetFB2_2: FB2.2
NetJ3_1: J3.1
NetJ3_3: J3.3 J3.4 J3.5 J3.6 J3.7 J3.8 J3.9
NetQ1_3: Q1.3 Q1.4 Q1.5 Q1.6 Q1.7
NetQ2_1: Q2.1
NetQ2_2: Q2.2 Q5.1
NetQ2_3: Q2.3 Q3.3 Q4.3 Q8.3 Q9.3 Q10.3 Q11.3 Q12.3
NetQ3_1: Q3.1
NetQ4_1: Q4.1
NetQ5_4: Q5.4
NetQ6_3: Q6.3 Q6.4 Q6.5 Q6.6 Q6.7
NetQ7_1: Q7.1 Q8.2
NetQ7_4: Q7.4
NetQ8_1: Q8.1
NetQ9_1: Q9.1
NetQ10_1: Q10.1
NetQ11_1: Q11.1
NetQ12_1: Q12.1
NetQ13_1: Q13.1
NetQ13_3: Q13.3 U3.1
NetR1_1: R1.1 R1.4
NetR1_2: R1.2 R1.3
NetR1_5: R1.5 R1.7 R1.8
NetR5_1: 
NetR6_2: 
NetR8_1: 
NetR12_1: 
NetR13_1: 
NetR14_2: 
NetR16_2: R16.2
NetR19_2: U4.1
pads on no net: *.1@65.5,40.9 *.2 *.3 *.4 *.5 *.6 *.7 *.8 *.9 *.10 *.11 *.12 *.13 *.14 D9.2 J1.1 J1.2 J1.3 J1.4 J1.5 J1.6 J1.7 J1.8 J1.9 J1.10 J1.11 J1.12 J1.13 J1.14 J1.15 J1.16 J1.17 J1.18 J1.19 J1.20 J1.21 J1.22 J1.23 J1.24 J1.25 J1.26 J1.MH1 J1.MH2 L1.3 Q13.2 R1.6 R1.9 R2.1 R2.2 R2.3 R2.4 R2.5 R2.6 R2.7 R2.8 R2.9 U3.3 U3.4 U3.5 U3.6 U3.7 U3.8 U4.2 U4.3 U4.4 U4.5 U4.6 U4.7 U4.8 U4.9 U4.10 U4.11 U4.12 U4.13 U4.14 U5.3
copper on no net:
  other v1: 60.866,38.911 61.466,38.911 62.066,38.911 62.666,38.911 63.266,38.911 63.866,38.911 64.466,38.911 65.166,38.911 60.366,39.211 65.466,39.511 60.166,39.811 65.466,40.211 60.166,40.411 65.466,40.711 60.166,41.011 65.466,41.311 60.166,41.611 65.466,41.911 60.166,42.211 65.466,42.511 60.166,42.811 65.466,43.111 60.666,43.211 61.166,43.611 65.466,43.711 61.666,44.011 65.466,44.311 61.966,44.511 65.466,44.911 61.966,45.111 65.466,45.511 61.966,45.711 65.466,46.111 61.966,46.311 65.466,46.711 61.966,46.911 65.466,47.311 61.966,47.511 65.466,47.911 61.966,48.111 65.466,48.511 62.266,48.611 62.766,48.911 63.366,48.911 63.966,48.911 64.566,48.911 65.166,48.911

## Polygon pours and split planes (outlines as drawn)
GND on Int1 (GND) (split plane): 175.49,26.51 26.51,26.51 26.51,125.49 175.49,125.49
no net on Int1 (GND) (split plane): 66.25,37.752 59.352,37.752 59.352,49.7 59.352,49.748 66.346,49.748
no net on Int4 (PWR) (split plane): 175.49,26.51 26.51,26.51 26.51,125.49 175.49,125.49

## Other copper
Int1 (GND) (plane layer: these items are gaps in the copper):
  lines w0.5: 59.1,37.5 66.5,37.5 66.6,50 59.1,50 59.1,49.7 59.1,37.5